# Altium PCB board2.PcbDoc
Units mm, origin at the board's own origin, x right, y up, seen from the top; angles counter-clockwise.
Board outline 14 x 33 mm, 2 copper layers (Component Side, Bottom Layer), stack 0.325 mm thick; 33 components, 30 nets, 186 pads, 66 vias.
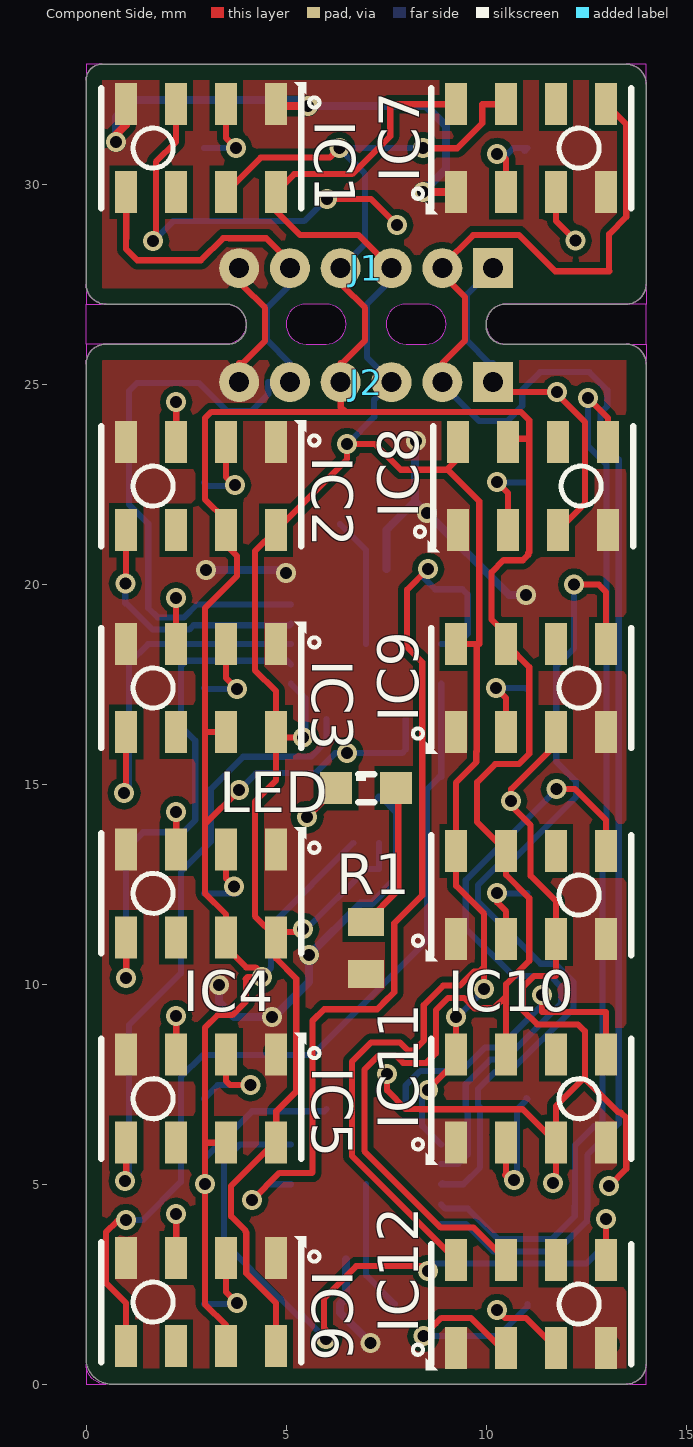
[diagram p0: Component Side view]
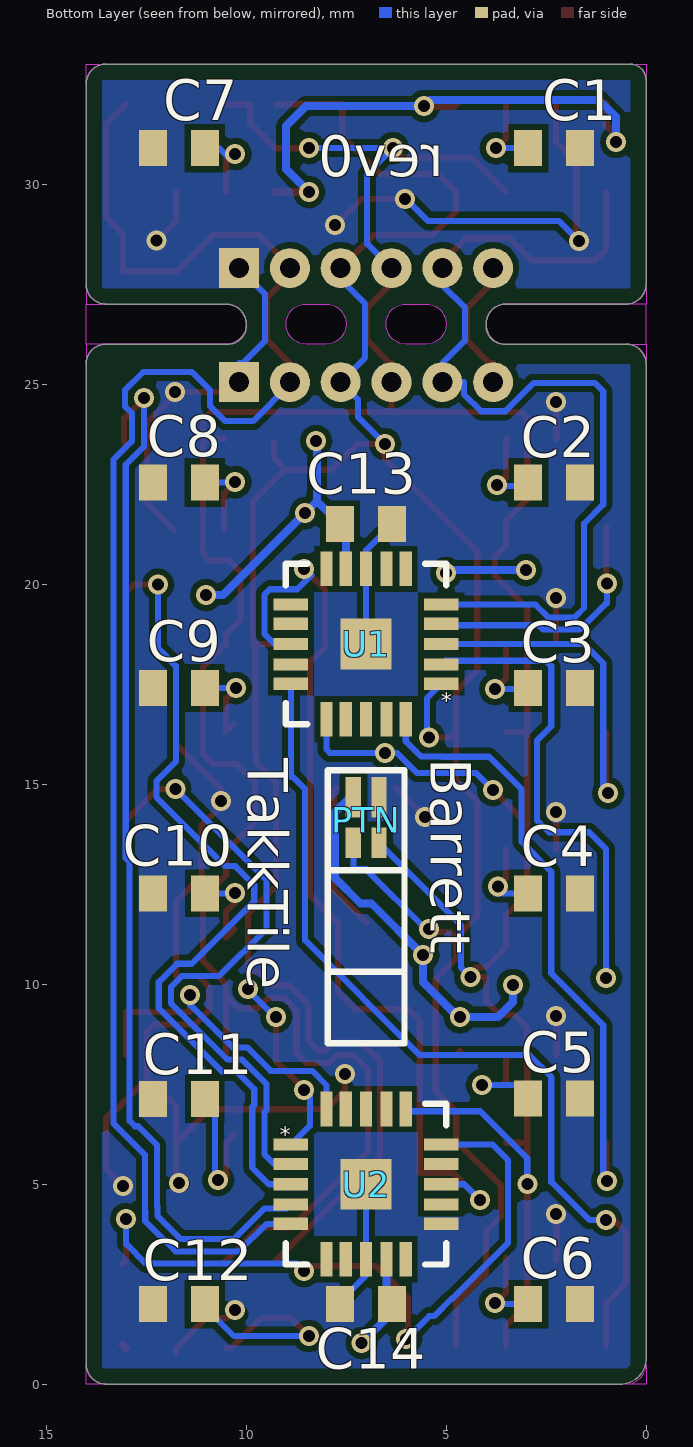
[diagram p1: Bottom Layer view, seen from below]

## Layer stack, top to bottom
Top Solder: solder mask 0.0102, Solder Resist, Dk 3.5
Component Side: signal copper 0.0356
Dielectric 1: core 0.254, FR-4, Dk 4.2
Bottom Layer: signal copper 0.0356
Solder Side: solder mask 0.0102, Solder Resist, Dk 3.5

## Board outline
0,0.637 0,25.5 cw(c0.5,25.5) 0.5,26 3.55,26 ccw(c3.55,26.45) 4,26.45 4,26.5 ccw(c3.5,26.5) 3.5,27 0.5,27 cw(c0.5,27.5) 0,27.5 0,32.6 cw(c0.4,32.6) 0.4,33 13.5,33 cw(c13.5,32.5) 14,32.5 14,27.5 cw(c13.5,27.5) 13.5,27 10.5,27 ccw(c10.5,26.5) 10,26.5 10,26.45 ccw(c10.45,26.45) 10.45,26 13.5,26 cw(c13.5,25.5) 14,25.5 14,0.5 cw(c13.5,0.5) 13.5,0 0.637,0 cw(c0.637,0.637)
cut-out: 14,27 10.5,27 ccw(c10.5,26.5) 10,26.5 ccw(c10.5,26.5) 10.5,26 14,26
cut-out: 0,27 3.5,27 cw(c3.5,26.5) 4,26.5 cw(c3.5,26.5) 3.5,26 0,26
cut-out: 8,27 ccw(c8,26.5) 7.5,26.5 ccw(c8,26.5) 8,26 8.5,26 ccw(c8.5,26.5) 9,26.5 ccw(c8.5,26.5) 8.5,27
cut-out: 5.5,27 ccw(c5.5,26.5) 5,26.5 ccw(c5.5,26.5) 5.5,26 6,26 ccw(c6,26.5) 6.5,26.5 ccw(c6,26.5) 6,27
cut-out: 0,0 0.5,0 cw(c0.5,0.5) 0,0.5
cut-out: 14,0 14,0.5 cw(c13.5,0.5) 13.5,0
cut-out: 14,25.5 ccw(c13.5,25.5) 13.5,26 14,26
cut-out: 13.5,27 ccw(c13.5,27.5) 14,27.5 14,27
cut-out: 13.5,33 cw(c13.5,32.5) 14,32.5 14,33
cut-out: 0,33 0,32.6 cw(c0.4,32.6) 0.4,33
cut-out: 0,27 0.5,27 cw(c0.5,27.5) 0,27.5
cut-out: 0,25.5 cw(c0.5,25.5) 0.5,26 0,26

## Design rules (kind name [scope] priority, off if disabled: settings)
BoardOutlineClearance [All] p1: gap=0.35 except(0.2: Text-OutlineEdge Text-CutoutEdge Text-CavityEdge Text-SplitBarrior Text-SplitContinuation; 0.4: Track-OutlineEdge Track-CutoutEdge Track-CavityEdge Track-SplitBarrior Track-SplitContinuation)
Clearance 0.127 [All] p1: gap=0.153
Clearance "Clearance (Same Net)" [All] p2: gap=0 except(0.127: SMDPad-SMDPad SMDPad-THPad; 0.152: SMDPad-Via)
ComponentClearance [All] p1: gap=0.127 collisioncheckmode=3 verticalgap=0.127 showdistances=FALSE
HoleSize [All] p1: absolutevalues=TRUE maxlimit=2.54 minlimit=0.254 maxpercent=80.000 minpercent=20.000
HoleToHoleClearance mdViaViaSameLayer [All] p1: gap=0.203 allowstackedmicrovias=TRUE
HoleToHoleClearance [All] p2: gap=0.254 allowstackedmicrovias=TRUE
MinimumSolderMaskSliver [All] p1: minsoldermaskwidth=0.025
PasteMaskExpansion mlMinCreamFrame [All] p1: expansion=0
PasteMaskExpansion [All] p2: expansion=0
PlaneConnect [All] p1: planeconnectstyle=Direct reliefexpansion=0.508 reliefentries=4 reliefconductorwidth=0.254 reliefairgap=0.254
PolygonConnect ThermalVias [IsVia] p1: connectstyle=Direct reliefconductorwidth=0.254 reliefentries=4 polygonreliefangle="90 Angle" airgapwidth=0.254
PolygonConnect [All] p2: connectstyle=Direct reliefconductorwidth=0.254 reliefentries=4 polygonreliefangle="90 Angle" airgapwidth=0.254
RoutingVias [All] p1: holewidth=0.3 width=0.5 viastyle="Through Hole" minholewidth=0.3 minwidth=0.5 maxholewidth=0.3 maxwidth=0.5
SilkToSilkClearance [All] p1 off: silktosilkclearance=0.254
SilkToSolderMaskClearance [IsPad] p1 off: minsilkscreentomaskgap=0.254 clearancetoexposedcopper=TRUE
SolderMaskExpansion mlMinStopFrame [All] p1: expansion=0.051
SolderMaskExpansion [All] p2: expansion=0.102
Width Width_1 [All] p1: maxlimit=0.3 minlimit=0.153 preferedwidth=0.153
Width [All] p2: maxlimit=0.254 minlimit=0.254 preferedwidth=0.254
22 further rules are at their usual default settings.

## Classes and differential pairs
component class board: C1 C2 C3 C5 C6 C7 C8 C9 C10 C11 C12 C13 C14 IC1 IC2 IC3 IC4 IC5 IC6 IC7 IC9 IC10 IC11 IC12 J1 J2 LED PTN R1 U1

## Components (designator, comment, footprint, x,y, rotation, side; value= is the part's Value field where it differs from the comment)
C1 "1uF" C0402 2.3,30.9 r180 bottom
C2 "1uF" C0402 2.3,22.539 r180 bottom
C3 "1uF" C0402 2.3,17.404 r180 bottom
C4 "1uF" C0402 2.3,12.269 r180 bottom
C5 "1uF" C0402 2.3,7.135 r180 bottom
C6 "1uF" C0402 2.3,2 r180 bottom
C7 "1uF" C0402 11.683,30.9 r0 bottom
C8 "1uF" C0402 11.683,22.539 r0 bottom
C9 "1uF" C0402 11.683,17.404 r0 bottom
C10 "1uF" C0402 11.683,12.269 r0 bottom
C11 "1uF" C0402NOMECH 11.683,7.127 r0 bottom
C12 "1uF" C0402 11.683,2 r0 bottom
C13 "1uF" C0402 7,21.498 r180 bottom
C14 "1uF" C0402 7,2 r0 bottom
IC1 "MPL115A2" MPL115A2 1.675,30.9 r270 top
IC2 "MPL115A2" MPL115A2 1.675,22.45 r270 top
IC3 "MPL115A2" MPL115A2 1.675,17.404 r270 top
IC4 "MPL115A2" MPL115A2 1.675,12.269 r270 top
IC5 "MPL115A2" MPL115A2 1.675,7.135 r270 top
IC6 "MPL115A2" MPL115A2 1.675,2.05 r270 top
IC7 "MPL115A2" MPL115A2 12.325,30.9 r90 top
IC8 "MPL115A2" MPL115A2 12.375,22.45 r90 top
IC9 "MPL115A2" MPL115A2 12.325,17.404 r90 top
IC10 "MPL115A2" MPL115A2 12.325,12.225 r90 top
IC11 "MPL115A2" MPL115A2 12.325,7.135 r90 top
IC12 "MPL115A2" MPL115A2 12.325,2 r90 top
J1 "CON6THR127" CON6THR127NOSILK 7,27.9 r0 top
J2 "CON6THR127" CON6THR127NOSILK 7,25.05 r0 top
LED "LEDSML0603" SML0603 7,14.9 r0 top
PTN "PTN4H" PTN4H 7,14.1 r180 bottom
R1 "120R" R0402 7,10.9 r270 top
U1 "ATTINY24A-MU-QFN20" QFN50P400X400X80-21N 7,18.5 r0 bottom
U2 "ATTINY24A-MU-QFN20" QFN50P400X400X80-21N 7,4.998 r180 bottom

## Footprints (in the part's own frame and the unit in brackets; to place one, negate y for a bottom-side part, rotate by r counter-clockwise, add the part's x,y. Pads: shape width x height; smd on the part's side, far side on the other; paste and mask are expansions set on the pad)
C0402 [mm] "C0402"
  rect 0.7x0.9 smd: 1(-0.65,0) 2(0.65,0)
C0402NOMECH [mm] "C0402"
  rect 0.7x0.9 smd: 1(-0.65,0) 2(0.65,0)
CON6THR127NOSILK [mm] "Connector, Through Hole, 1.27mm"
  round 1 hole 0.5: 1(-3.175,0) 2(-1.905,0) 3(-0.635,0) 4(0.635,0) 5(1.905,0)
  rect 1x1 hole 0.5: 6(3.175,0)
MPL115A2 [mm] "MPL115A2"
  rect 1.05x0.55 smd: 1(-1.1,3.075) 2(-1.1,1.825) 3(-1.1,0.575) 4(-1.1,-0.675) 5(1.1,-0.675) 6(1.1,0.575) 7(1.1,1.825) 8(1.1,3.075)
  silkscreen extent -1.65,-1.3 1.5,4.16
PTN4H [mm]
  rect 0.38x1.02 smd: 0(-0.32,0.57) 1(0.32,0.57)
  rect 0.38x0.76 smd: 2(-0.32,-0.57) 3(0.32,-0.57)
  silkscreen extent -0.96,-5.58 0.96,1.25
QFN50P400X400X80-21N [mil] "QFN50P400X400X80-21N"
  rect 34x12 smd: 1(-74,39) 2(-74,20) 3(-74,0) 4(-74,-20) 5(-74,-39) 11(74,-39) 12(74,-20) 13(74,0) 14(74,20) 15(74,39)
  rect 12x34 smd: 6(-39,-74) 7(-20,-74) 8(0,-74) 9(20,-74) 10(39,-74) 16(39,74) 17(20,74) 18(0,74) 19(-20,74) 20(-39,74)
  rect 50x50 smd: 21(0,0)
  silkscreen extent -79,-79 79,79
R0402 [mm] "R0402"
  rect 0.7x0.9 smd: 1(-0.65,0) 2(0.65,0)
SML0603 [mil] "SML0603"
  rect 31.5x31.5 smd: A(29.53,0) C(-29.53,0)
  silkscreen extent -10,-14 8,16

## Part data
C1 C2 C3 C4 C5 C6 C7 C8 C9 C10 C11 C12 C13 C14: library part C-EUC0402, "CAPACITOR, European symbol"
LED: "LED   OSRAM: - CHIPLED LG R971, LG N971, LY N971, LG Q971, LY Q971, LO R971, LY R971 LH N974, LH R974 LS Q976, LO Q976, LY Q976 LO Q996 - Hyper CHIPLED LW Q18S LB Q993, LB Q99A, LB R99A - SideLED LS A670, LO A670, LY A670, LG A670, LP A670 LB A673, LV A673, LT A673, LW A673 LH A674 LY A675 LS A676, LA A676, LO A676, LY A676, LW A676 LS A679, LY A679, LG A679 -  Hyper Micro SIDELED® LS Y876, LA Y876, LO Y876, LY Y876 LT Y87S - SmartLED LW L88C, LW L88S LB L89C, LB L89S, LG L890 LS L89K, LO L89K, LY L89K LS L896, LA L896, LO L896, LY L896 - TOPLED LS T670, LO T670, LY T670, LG T670, LP T670 LSG T670, LSP T670, LSY T670, LOP T670, LYG T670 LG T671, LOG T671, LSG T671 LB T673, LV T673, LT T673, LW T673 LH T674 LS T676, LA T676, LO T676, LY T676, LB T676, LH T676, LSB T676, LW T676 LB T67C, LV T67C, LT T67C, LS T67K, LO T67K, LY T67K, LW E67C LS E67B, LA E67B, LO E67B, LY E67B, LB E67C, LV E67C, LT E67C LW T67C LS T679, LY T679, LG T679 LS T770, LO T770, LY T770, LG T770, LP T770 LB T773, LV T773, LT T773, LW T773 LH T774 LS E675, LA E675, LY E675, LS T675 LS T776, LA T776, LO T776, LY T776, LB T776 LHGB T686 LT T68C, LB T68C - Hyper Mini TOPLED® LB M676 - Mini TOPLED Santana® LG M470 LS M47K, LO M47K, LY M47K    Source: http://www.osram.convergy.de   LUXEON: - LUMILED® LXK2-PW12-R00, LXK2-PW12-S00, LXK2-PW14-U00, LXK2-PW14-V00 LXK2-PM12-R00, LXK2-PM12-S00, LXK2-PM14-U00 LXK2-PE12-Q00, LXK2-PE12-R00, LXK2-PE12-S00, LXK2-PE14-T00, LXK2-PE14-U00 LXK2-PB12-K00, LXK2-PB12-L00, LXK2-PB12-M00, LXK2-PB14-N00, LXK2-PB14-P00, LXK2-PB14-Q00 LXK2-PR12-L00, LXK2-PR12-M00, LXK2-PR14-Q00, LXK2-PR14-R00 LXK2-PD12-Q00, LXK2-PD12-R00, LXK2-PD12-S00 LXK2-PH12-R00, LXK2-PH12-S00 LXK2-PL12-P00, LXK2-PL12-Q00, LXK2-PL12-R00    Source: www.luxeon.com   KINGBRIGHT:   KA-3528ASYC Source: www.kingbright.com"
PTN: "Omnetics PTN Connector 4 pins, Horizontal"
R1: library part R-US_R0402, "RESISTOR, American symbol"
U1 U2: library part ATTINY24A-MU, "Microcontroller"

## Via types
v1: diameter 0.5, hole 0.3, Component Side to Bottom Layer, 66 vias

## Nets (pads, with @x,y where several pads share a name; then routed paths per layer and width w, separated by ;. In a path a pad name is that pad's centre, name@x,y a point inside that pad or via, vN(x,y) a via of type N, cw(c..) or ccw(c..) an arc to the next point about the centre after c; other vN are vias at no path point)
GND: C1.2 C2.2 C3.2 C4.2 C5.2 C6.2 C7.2 C8.2 C9.2 C10.2 C11.2 C12.2 C13.2 C14.2 IC1.3 IC2.3 IC3.3 IC4.3 IC5.3 IC6.3 IC7.3 IC8.3 IC9.3 IC10.3 IC11.3 IC12.3 J1.6 J2.6 LED.C PTN.1 U1.8 U1.21 U2.8 U2.11 U2.21 | length 60.1
  Component Side w0.153: v1(1.675,28.575) 1.746,28.646 1.746,30.554 2.25,31.059 IC1.3 ; IC3.3 v1(2.25,19.647) ; v1(5.525,14.175) LED.C ; v1(6.025,29.625) 7.125,29.625 v1(7.775,28.975) ; v1(7.525,7.75) 7.525,7.343 7.991,6.878 8.345,6.878 8.352,6.871 10.914,6.871 IC11.3 ; v1(10.276,1.85) 10.471,1.654 10.995,1.654 IC12.3 IC12.3@11.75,0.775 ; J2.6@10.479,25.354 J2.6 10.425,24.8 v1(11.775,24.8) 11.775,24.747 12.476,24.046 12.476,22.026 IC8.3 ; v1(11.675,5.025) 11.7,5 11.75,5.05 IC11.3 ; IC9.3 11.75,15.997 10.625,14.872 v1(10.625,14.575) 10.625,14.459 11.112,13.972 11.112,12.704 11.75,12.066 IC10.3 11.75,10.217 11.738,10.205 11.202,10.205 10.921,9.924 10.921,9.347 11.273,8.994 12.295,8.994 12.471,8.818 ; IC7.3 11.75,29.075 v1(12.241,28.584) ; v1(13.075,4.95) 13.504,5.379 13.504,6.655 13.37,6.789 13.321,6.789 12.471,7.639 12.471,7.675 11.75,6.954 IC11.3
  Component Side w0.16: IC6.3@2.25,3.1 v1@2.25,4.025 ; IC5.3 v1(2.25,9.2) ; IC4.3 v1(2.25,14.301) ; IC2.3@2.25,23.639 v1(2.25,24.55) ; J1.6@9.746,27.7 J1.6@10.14,27.7 ; 12.471,7.675 12.471,8.818 ; v1@2.25,4.025 v1(2.25,4.258) v1@2.25,4.025
  Bottom Layer w0.153: v1(1.675,28.575) 2.175,29.075 5.45,29.075 6,29.625 v1(6.025,29.625) ; v1@5.5,14.175 v1(5.525,14.175) ; C13.2 7,20.848 U1.8 U1.21 ; U2.21 U2.8 7,2.718 7.718,2 C14.2 ; v1(7.525,7.75) v1@7.535,7.741 ; v1@10.175,1.75 v1(10.276,1.85) ; J2.6 10.175,25.523 10.079,25.523 9.524,26.079 9.524,27.249 J1.6 ; v1@11.625,5.025 v1(11.675,5.025)
NetC1_1: C1.1 IC1.2 | length 2
  Component Side w0.153: IC1.2 3.5,31.15 v1(3.75,30.9)
  Bottom Layer w0.153: C1.1 v1(3.75,30.9)
NetC2_1: C2.1 IC2.2 | length 2.1
  Component Side w0.153: IC2.2 3.5,22.675 3.699,22.476 v1(3.725,22.476)
  Component Side w0.16: IC2.2 IC2.2@3.5,23.639
  Bottom Layer w0.153: C2.1 3.039,22.45 3.675,22.45 3.701,22.476 v1(3.725,22.476)
NetC3_1: C3.1 IC3.2 | length 2.1
  Component Side w0.153: IC3.2 3.5,17.65 v1(3.775,17.375)
  Bottom Layer w0.153: C3.1 2.979,17.375 v1(3.775,17.375)
NetC4_1: C4.1 IC4.2 | length 2.1
  Component Side w0.153: IC4.2 3.5,12.644 v1(3.702,12.442)
  Bottom Layer w0.153: C4.1 3.769,12.269 3.8,12.3 3.702,12.398 v1(3.702,12.442)
NetC5_1: C5.1 IC5.2 | length 2.6
  Component Side w0.153: IC5.2 3.5,7.575 3.601,7.474 v1(4.108,7.474)
  Bottom Layer w0.153: C5.1 3.289,7.474 v1(4.108,7.474)
NetC6_1: C6.1 IC6.2 | length 2.2
  Component Side w0.153: IC6.2 3.5,2.3 v1(3.775,2.025)
  Bottom Layer w0.153: C6.1 3.8,2 3.825,2.025 v1(3.775,2.025)
NetC7_1: C7.1 IC7.2 | length 2.1
  Component Side w0.153: v1(10.276,30.752) 10.373,30.752 10.5,30.625 IC7.2
  Bottom Layer w0.153: v1(10.276,30.752) 10.323,30.752 10.425,30.65 10.675,30.9 C7.1 C7.1@10.96,30.827
NetC8_1: C8.1 IC8.2 | length 2.1
  Component Side w0.153: v1(10.275,22.55) 10.55,22.275 IC8.2
  Bottom Layer w0.153: v1(10.275,22.55) 10.286,22.539 C8.1 C8.1@11.022,22.55
NetC9_1: C9.1 IC9.2 | length 2.3
  Component Side w0.153: v1(10.25,17.4) 10.5,17.15 IC9.2 IC9.2@10.301,16.503
  Bottom Layer w0.153: v1(10.25,17.4) 10.254,17.404 C9.1 C9.1@11.005,17.376
NetC10_1: C10.1 IC10.2 | length 2.3
  Component Side w0.153: v1(10.275,12.275) 10.275,12.042 10.5,11.817 IC10.2@10.5,11.169
  Component Side w0.16: IC10.2@10.3,11.369 IC10.2@10.5,11.169
  Bottom Layer w0.153: v1(10.275,12.275) 10.281,12.269 C10.1 C10.1@11.027,12.276
NetC11_1: C11.1 IC11.2 | length 3.6
  Component Side w0.153: IC11.2@10.301,6.234 IC11.2 10.5,5.25 10.475,5.225 10.6,5.1 v1(10.701,5.1)
  Bottom Layer w0.153: v1(10.701,5.1) 10.775,5.175 10.775,6.869 C11.1 C11.1@11.01,7.15
NetC12_1: C12.1 IC12.2 | length 5.5
  Component Side w0.153: v1(8.432,1.203) 8.746,1.517 8.746,1.52 8.88,1.654 9.62,1.654 10.375,0.9 IC12.2
  Bottom Layer w0.153: v1(8.432,1.203) 10.307,1.203 11.033,1.93 C12.1
NetLED_A: LED.A R1.1 | length 3.7
  Component Side w0.16: R1.1 7.808,12.358 7.808,14.842 LED.A
RESET: U1.13 U2.13 | length 23.7
  Component Side w0.153: v1(4.15,4.6) 4.83,5.28 5.648,5.28 5.659,5.291 ; 8.025,18.425 8.025,19.858 8.547,20.38 v1(8.55,20.376)
  Component Side w0.16: 5.659,5.291 5.659,9.084 5.95,9.375 7.275,9.375 7.546,9.646 7.555,9.646 7.704,9.795 7.704,11.525 8.404,12.225 8.404,18.046 8.025,18.425
  Bottom Layer w0.153: v1(4.15,4.6) 4.548,4.998 U2.13 ; v1(8.55,20.376) 8.524,20.376 8.373,20.225 8.725,19.872 9.406,19.872 9.541,19.738 9.541,18.761 9.28,18.5 U1.13
RST01: IC1.5 J1.2 J2.2 U1.5 | length 24.4
  Component Side w0.153: 1,28.65 1,28.375 1.28,28.096 2.87,28.096 3.425,28.65 3.575,28.65 ; 4.5,28.65 5.095,28.055 J1.2
  Component Side w0.16: 1,28.65 IC1.5 ; 3.575,28.65 4.5,28.65 ; J1.2@4.746,27.7 5.06,27.7 J1.2@5.06,27.9
  Bottom Layer w0.153: J1.2 5.095,27.476 4.524,26.904 4.524,26.096 5.095,25.524 J2.2 4.555,25.05 4.555,24.748 4.127,24.321 3.523,24.321 2.814,25.03 1.28,25.03 1.071,24.821 1.071,21.994 1.553,21.511 1.553,19.403 1.788,19.167 2.449,19.167 2.772,19.491 U1.5
RST01_2: IC7.5 J1.5 J2.5 U2.5 | length 43.9
  Component Side w0.153: J2.5 8.905,25.524 9.476,26.096 9.476,27.174 8.905,27.745 J1.5 8.905,27.955 9.675,28.725 10.825,28.725 11.725,27.825 ; IC7.5 13.504,31.496 13.504,29.18 13.075,28.75 13.075,27.825
  Component Side w0.16: 11.725,27.825 13.075,27.825
  Bottom Layer w0.153: U2.5 9.49,4.007 10.18,3.317 11.766,3.317 12.521,4.072 12.521,4.324 12.531,4.334 12.531,5.731 13.316,6.516 13.316,23.113 12.856,23.573 12.856,24.278 13.029,24.451 13.029,24.849 12.578,25.3 11.35,25.3 10.905,24.855 10.905,24.455 10.525,24.075 9.825,24.075 8.905,24.995 J2.5
RST02: IC2.5 U1.4 | length 6.4
  Component Side w0.153: v1(0.979,20.018) 1,20.039 IC2.5
  Component Side w0.16: IC2.5 IC2.5@1,21.439
  Bottom Layer w0.153: v1(0.979,20.018) 0.979,19.523 1,19.523 1.662,18.861 2.575,18.861 2.685,18.971 5.083,18.971 U1.4
RST02_2: IC8.5 U2.4 | length 26.3
  Component Side w0.153: v1(12.55,24.65) 13.05,24.15 IC8.5
  Bottom Layer w0.153: U2.4 8.98,4.389 9.541,4.389 10.307,3.623 11.639,3.623 12.215,4.199 12.215,4.45 12.225,4.461 12.225,5.975 12.697,6.447 12.778,6.447 12.913,6.582 12.913,13.052 13.01,13.149 13.01,22.986 12.55,23.446 v1(12.55,24.65)
RST03: IC3.5 U1.3 | length 9.1
  Component Side w0.153: v1(0.95,14.775) 1,14.825 IC3.5
  Bottom Layer w0.153: v1(0.95,14.775) 1.071,14.895 1.071,18.02 1.55,18.5 U1.3
RST03_2: IC9.5 U2.3 | length 21.9
  Component Side w0.153: v1(12.2,19.986) 12.816,19.986 13,19.802 IC9.5
  Bottom Layer w0.153: U2.3@8.907,5.025 U2.3 9.432,4.998 9.847,5.413 9.847,6.926 9.796,6.977 9.796,7.374 10.228,7.806 10.592,7.806 12.186,9.4 12.186,10.051 11.726,10.511 11.361,10.511 9.796,12.076 9.796,12.474 10.271,12.949 10.516,12.949 12.244,14.676 12.244,15.074 11.754,15.564 11.754,17.949 12.2,18.395 v1(12.2,19.986)
RST04: IC4.5 U1.2 | length 13.1
  Component Side w0.16: v1(1,10.15) IC4.5
  Bottom Layer w0.153: v1(1,10.15) 1,13.369 1.427,13.796 2.426,13.796 2.73,14.1 2.73,16.09 2.37,16.449 2.37,17.949 2.505,18.083 5.029,18.083 U1.2
RST04_2: IC10.5 U2.2 | length 15.9
  Component Side w0.153: v1(11.764,14.875) 12.225,14.875 13,14.1 IC10.5
  Bottom Layer w0.153: U2.2 9.306,5.506 9.541,5.741 9.541,6.799 9.49,6.85 9.49,7.501 10.102,8.112 10.466,8.112 11.88,9.527 11.88,9.924 11.599,10.205 10.674,10.205 9.49,11.39 9.49,12.6 v1(11.764,14.875)
RST05: IC5.5 U1.20 | length 15.6
  Component Side w0.16: v1(0.975,5.075) 1,5.1 IC5.5
  Bottom Layer w0.153: v1(0.975,5.075) 1.071,5.171 1.071,8.971 2.37,10.27 2.37,12.814 3.115,13.559 3.115,14.875 3.925,15.685 5.099,15.685 5.1,15.686 5.627,15.686 6.009,16.068 U1.20
RST05_2: IC11.5 U2.20 | length 8.2
  Component Side w0.153: v1(11.4,9.725) 11.4,9.3 13,9.3 IC11.5
  Bottom Layer w0.153: U2.20 7.991,7.469 8.352,7.83 9.386,7.83 9.975,8.418 10.339,8.418 11.4,9.48 v1(11.4,9.725)
RST06: IC6.5 U1.15 | length 22.3
  Component Side w0.153: IC6.5 1,2.026 0.496,2.53 0.496,3.796 0.775,4.075 0.975,4.075 v1(1,4.1)
  Bottom Layer w0.153: v1@1.05,4.025 1.05,4.05 v1(1,4.1) 1.414,4.1 2.37,5.057 2.37,7.68 2.918,8.227 5.659,8.227 8.525,11.093 8.525,14.875 8.825,15.175 8.88,15.175 U1.15
RST06_2: IC12.5 U2.15 | length 18.2
  Component Side w0.153: v1(6,1.125) 6,1.351 5.95,1.401 5.95,2.15 6.75,2.95 8.373,2.95 8.497,2.825 v1(8.55,2.825) ; v1(13,4.125) 13.025,4.125 13,4.1 IC12.5 IC12.5@13.101,2.999
  Bottom Layer w0.153: 3.45,4.801 3.45,3.53 4.846,2.135 4.865,2.135 5.3,1.7 5.425,1.7 v1(6,1.125) 5.925,1.05 v1@5.861,1.05 ; 3.45,5.199 3.45,5.6 3.839,5.989 U2.15 ; 3.451,4.801 3.451,5.199 ; v1(8.55,2.825) 8.737,3.012 12.504,3.012 13,3.508 v1(13,4.125)
SCL: IC1.8 IC2.8 IC3.8 IC4.8 IC5.8 IC6.8 IC7.8 IC8.8 IC9.8 IC10.8 IC11.8 IC12.8 J1.4 J2.4 PTN.2 U1.1 U2.1 | length 80.7
  Component Side w0.153: 4.221,12.075 4.221,11.698 IC4.8 ; 4.221,13.65 4.221,14.325 ; 4.221,17.85 4.75,17.321 IC3.8 ; 4.221,20.45 4.221,20.821 IC2.8 6.525,23.125 v1(6.525,23.5) 7.228,23.5 7.529,23.199 ; 4.308,14.65 4.75,15.092 IC3.8 ; IC6.8 4.75,2.026 4.004,2.771 4.004,3.789 3.985,3.808 3.985,3.836 3.625,4.196 3.625,4.955 4.705,6.035 IC5.8 ; 5.258,10.132 4.75,10.64 IC4.8 ; v1(5.427,11.378) 5.349,11.3 4.881,11.3 IC4.8 ; v1(5.427,16.166) 4.891,16.166 4.889,16.164 IC3.8 ; 7.529,23.197 7.867,22.86 7.875,22.86 ; 7.6,31.2 6.65,30.25 5.2,30.25 IC1.8 4.75,29.325 5.35,28.725 6.81,28.725 J1.4 ; 8.521,22.86 9.014,22.86 9.029,22.875 9.3,23.146 IC8.8 ; v1(8.55,7.35) 8.525,7.35 9.25,8.075 IC11.8 ; IC12.8 6.65,5.7 6.65,8.066 7.12,8.536 7.851,8.536 8.051,8.335 8.185,8.335 8.44,8.59 8.44,9.475 8.925,9.961 9.345,9.961 9.7,10.316 9.837,10.316 9.95,10.43 ; IC10.8@9.25,13.369 9.25,15.045 9.755,15.549 9.755,15.813 9.767,15.825 ; IC11.8 v1(9.25,9.175) ; IC10.8 9.25,12.454 9.95,11.754 9.95,10.43 ; v1(9.95,9.875) 9.95,10.43
  Component Side w0.16: 4.221,12.075 4.221,13.65 ; 4.221,14.325 4.221,14.563 4.308,14.65 ; 4.221,17.85 4.221,20.45 ; IC5.8 4.75,6.817 5.258,7.325 5.258,10.132 ; 7.6,31.2 7.6,32 IC7.8 ; 7.875,22.86 8.521,22.86 ; 9.029,22.875 9.829,22.075 9.829,18.504 9.779,18.504 ; IC9.8 9.779,18.504 ; 9.767,15.825 9.767,18.492 9.779,18.504
  Bottom Layer w0.153: U1.1 5.481,17.149 5.481,16.256 5.427,16.202 v1(5.427,16.166) ; v1(5.427,11.378) 5.509,11.378 7.006,12.875 7.32,12.875 PTN.2 ; v1(6.525,23.5) 7.207,24.182 7.207,24.218 7.2,24.225 7.2,24.615 J2.4 7.024,25.662 7.024,27.006 7.635,27.617 J1.4 ; v1(8.55,7.35) 8.4,7.2 8.4,6.45 8.418,6.45 U2.1 ; v1(9.25,9.175) 9.275,9.175 9.95,9.85 v1(9.95,9.875)
SDA: IC1.7 IC2.7 IC3.7 IC4.7 IC5.7 IC6.7 IC7.7 IC8.7 IC9.7 IC10.7 IC11.7 IC12.7 J1.3 J2.3 PTN.3 U1.16 U2.16 | length 97.1
  Component Side w0.153: 2.971,2 3.5,1.471 IC6.7 ; v1@2.971,4.9 v1(2.971,5) ; 2.971,8.912 3.284,9.225 3.65,9.225 4,9.575 4,10.122 3.989,10.132 4.035,10.178 v1(4.391,10.178) 4.391,10.266 4.237,10.419 4,10.419 3.5,10.919 IC4.7 3.5,11.74 2.971,12.269 ; 2.971,13.875 2.971,13.996 v1(3.825,14.85) ; 2.971,19.4 3.775,20.204 3.775,20.7 3.5,20.975 IC2.7 3.5,21.596 2.971,22.125 ; 2.971,23.65 2.971,24.146 3.13,24.305 6.485,24.305 ; IC1.7 4.363,30.662 6.092,30.662 v1(6.33,30.9) ; 6.365,24.425 6.485,24.305 ; J2.3 6.365,25.523 6.404,25.523 6.976,26.096 6.976,26.904 J1.3@6.404,27.476 ; J1.3 J1.3@6.365,27.516 ; IC12.7 9.689,3.911 8.872,3.911 6.956,5.827 6.956,7.859 7.327,8.23 7.724,8.23 7.925,8.029 8.503,8.029 8.746,8.272 8.746,9.349 9.052,9.655 9.449,9.655 9.708,9.396 10.196,9.396 10.5,9.7 ; IC11.7 10.5,9.7 ; 11.079,10.625 11.079,10.579 10.5,10 10.5,9.7 ; 11.079,11.325 11.079,12.149 10.5,12.728 IC10.7 9.775,14.05 9.775,15.05 10.225,15.5 10.821,15.5 11.079,15.758 11.079,16.225 ; 11.079,17.825 11.079,17.925 IC9.7 10.5,18.75 10.138,19.112 10.138,20.3 10.434,20.595 10.92,20.595 11.054,20.73 11.054,20.775 11.079,20.8 ; 11.079,23.639 11.079,24.096 10.87,24.305 6.485,24.305 ; J1.3@6.365,27.516 6.365,27.476 J1.3@6.404,27.476 ; J1.3@6.365,27.516 J1.3@6.404,27.476
  Component Side w0.16: 2.971,2 v1@2.971,4.9 ; v1(2.971,5) 2.971,6.035 ; 2.971,8.912 2.971,6.035 ; 2.971,12.269 2.971,13.875 ; 2.971,13.996 2.971,16.304 ; 2.971,19.4 2.971,16.304 ; 2.971,22.125 2.971,23.65 ; IC5.7 2.971,6.035 ; IC3.7 2.971,16.304 ; 6.365,24.425 J2.3 ; v1(8.425,30.9) 9.28,30.9 9.9,31.52 9.9,32 IC7.7 ; IC8.7@10.55,23.639 11.079,23.639 11.079,20.8 ; 11.079,10.625 11.079,11.325 ; 11.079,16.225 11.079,17.825
  Bottom Layer w0.153: v1(2.971,5) 2.971,5.644 4.147,6.821 5.953,6.821 U2.16 ; v1(3.825,14.85) 4.25,15.275 5.725,15.275 6.226,15.776 v1(6.525,15.776) ; v1(4.391,10.178) 4.625,10.412 4.625,11.475 PTN.3 ; J1.3 6.975,28.51 6.975,30.255 v1(6.33,30.9) v1(8.425,30.9) ; v1@6.761,15.776 7.9,15.776 7.991,15.866 U1.16
VCC: C13.1 C14.1 IC1.1 IC1.4 IC2.1 IC2.4 IC3.1 IC3.4 IC4.1 IC4.4 IC5.1 IC5.4 IC6.1 IC6.4 IC7.1 IC7.4 IC8.1 IC8.4 IC9.1 IC9.4 IC10.1 IC10.4 IC11.1 IC11.4 IC12.1 IC12.4 J1.1 J2.1 PTN.0 R1.2 U1.9 U2.9 | length 38.7
  Component Side w0.153: J2.1 3.825,25.523 3.921,25.523 4.476,26.079 4.476,26.904 3.904,27.476 3.825,27.476 J1.1 ; IC5.1@4.65,8.335 IC5.1
  Component Side w0.2: v1(0.75,31.052) 0.684,31.118 0.684,31.166 1,31.482 IC1.4 ; IC1.1 4.8,31.95 v1(5.55,31.95) ; v1(5.575,10.725) v1@5.575,10.75 ; v1(8.425,29.8) IC7.1 ; IC12.4 IC12.4@13.086,0.986
  Bottom Layer w0.153: v1@5.401,32.099 v1(5.55,31.95) ; v1@8.225,23.55 v1(8.25,23.575)
  Bottom Layer w0.2: v1(0.75,31.052) 0.75,31.675 1.174,32.099 v1@5.401,32.099 ; v1(3,20.351) 4.924,20.351 v1(5,20.275) ; v1(3.325,9.975) 3.325,9.55 3.7,9.175 v1(4.65,9.175) 4.65,9.125 5.575,10.05 v1(5.575,10.725) 6.862,12.012 7.134,12.012 7.775,12.652 7.775,14.3 7.405,14.67 PTN.0 ; v1(5.55,31.95) 8.5,31.95 9,31.45 9,30.375 v1(8.425,29.8) ; U2.9 6.492,2.142 C14.1 6.35,1.786 v1(7.111,1.025) ; U1.9 7.508,21.356 C13.1 8.225,22.073 ; v1@8.225,23.55 8.225,22.073 ; v1(11,19.725) 10.576,19.725 8.525,21.776 v1(8.522,21.776) 8.225,22.073
pads on no net: IC1.6 IC2.6 IC3.6 IC4.6 IC5.6 IC6.6 IC7.6 IC8.6 IC9.6 IC10.6 IC11.6 IC12.6 U1.6 U1.7 U1.10 U1.11 U1.12 U1.14 U1.17 U1.18 U1.19 U2.6 U2.7 U2.10 U2.12 U2.14 U2.17 U2.18 U2.19

## Polygon pours and split planes (outlines as drawn)
VCC on Component Side "VCC_Plane2" (solid, pour order 16): 0.4,25.6 13.5,25.6 13.5,0.4 7.1,0.4 0.4,0.4
VCC on Component Side "VCC_Plane1" (solid, pour order 8): 0.4,32.6 0.4,27.4 13.6,27.4 13.6,32.6
GND on Bottom Layer "GND_Plane2" (solid, pour order 18): 0.4,32.6 13.6,32.6 13.6,27.4 0.4,27.4
GND on Bottom Layer "GND_Plane" (solid, pour order 10): 0.4,25.5 0.4,0.4 13.6,0.4 13.6,25.5

## Silkscreen, mask and mechanical layers (free items; w line width, h text height)
Bottom Overlay:
  text "rev0" at 5.055,30.201 h1.02
  text "Barrett /  /  / TakkTile" at 9.957,15.646 h1.02 r90
Mechanical 1:
  lines w0.1: 0,0.637 ccw(c0.637,0.637) 0.637,0 ; 0,25.5 cw(c0.5,25.5) 0.5,26 ; 0,27.5 ccw(c0.5,27.5) 0.5,27 ; 0,32.6 cw(c0.4,32.6) 0.4,33 ; 3.5,27 cw(c3.5,26.5) 4,26.5 ; 3.55,26 ccw(c3.55,26.45) 4,26.45 ; 10,26.45 ccw(c10.45,26.45) 10.45,26 ; 10,26.5 cw(c10.5,26.5) 10.5,27 ; 13.5,0 ccw(c13.5,0.5) 14,0.5 ; 13.5,26 cw(c13.5,25.5) 14,25.5 ; 13.5,27 ccw(c13.5,27.5) 14,27.5 ; 13.5,33 cw(c13.5,32.5) 14,32.5
  lines w0.16: 0,0.637 0,25.363 0,25.5 ; 0,27.5 0,32.6 ; 0.4,33 13.363,33 13.5,33 ; 0.5,26 3.55,26 ; 0.5,27 3.5,27 ; 0.637,0 13.5,0 ; 4,26.45 4,26.5 ; 10,26.45 10,26.5 ; 10.45,26 13.5,26 ; 10.5,27 13.5,27 ; 14,0.5 14,0.637 14,25.5 ; 14,27.5 14,32.5

## Text inside footprints (layer, text, board x,y; h text height)
U1: Bottom Overlay "*" at 4.841,17.611 h0.7 r180
U2: Bottom Overlay "*" at 9.159,5.887 h0.7; FabNotes "*" at 10.505,5.989 h0.7